# EAGLE board CT_schematic (EAGLE 7.6.0)

Size 100 x 80 mm. Coordinates in mm from the lower left corner, seen from the top.
Outline: 0,0 100,0 100,80 0,80 0,0
Copper layers (1*16): Top 0.035mm / dielectric 1.5mm / Bottom 0.035mm
Design rules "default": minimum track width 10mil, minimum drill 24mil, track to track 8mil, track to pad 8mil, pad to pad 8mil, via to via 8mil, smd to smd 8mil, copper to edge 40mil, drill to drill 8mil, minimum pad ring 10mil, minimum via ring 8mil, stop-mask expansion 4mil, vias tented up to drill 0mil, thermal gap 10mil

## Footprints (pad centres in the part's own frame; a part is rotated, then mirrored left to right if it is on the bottom)
C0603 = smd 0.8 x 0.8: 1 -0.762,0; 2 0.762,0
C0402 = smd 0.5 x 0.5: 1 -0.508,0; 2 0.508,0
C0805 = smd 1.2 x 1.3: 1 -1.016,0; 2 1.016,0
C1206 = smd 1.3 x 1.6: 1 -1.524,0; 2 1.524,0
C1210 = smd 1.2 x 2.5: 1 -1.524,0; 2 1.524,0
EXV-9H = smd 3.505 x 1.676: 1 -2.857,0; 2 2.857,0
L0603 = smd 0.8 x 0.8: 1 -0.762,0; 2 0.762,0
PJ-037B_PACKAGE = drill 3.7 square: 1 12,0 | drill 3.2 square: 2 6,0
R0603 = smd 0.8 x 0.8: 1 -0.762,0; 2 0.762,0
UFBGA144 = smd 0.32 x 0.32: A1 -2.75,2.75; A2 -2.25,2.75; A3 -1.75,2.75; A4 -1.25,2.75; A5 -0.75,2.75; A6 -0.25,2.75; A7 0.25,2.75; A8 0.75,2.75; A9 1.25,2.75; A10 1.75,2.75; A11 2.25,2.75; A12 2.75,2.75; B1 -2.75,2.25; B2 -2.25,2.25; B3 -1.75,2.25; B4 -1.25,2.25; B5 -0.75,2.25; B6 -0.25,2.25; B7 0.25,2.25; B8 0.75,2.25; B9 1.25,2.25; B10 1.75,2.25; B11 2.25,2.25; B12 2.75,2.25; C1 -2.75,1.75; C2 -2.25,1.75; C3 -1.75,1.75; C4 -1.25,1.75; C5 -0.75,1.75; C6 -0.25,1.75; C7 0.25,1.75; C8 0.75,1.75; C9 1.25,1.75; C10 1.75,1.75; C11 2.25,1.75; C12 2.75,1.75; D1 -2.75,1.25; D2 -2.25,1.25; D3 -1.75,1.25; D4 -1.25,1.25; D5 -0.75,1.25; D6 -0.25,1.25; D7 0.25,1.25; D8 0.75,1.25; D9 1.25,1.25; D10 1.75,1.25; D11 2.25,1.25; D12 2.75,1.25; E1 -2.75,0.75; E2 -2.25,0.75; E3 -1.75,0.75; E4 -1.25,0.75; E5 -0.75,0.75; E6 -0.25,0.75; E7 0.25,0.75; E8 0.75,0.75; E9 1.25,0.75; E10 1.75,0.75; E11 2.25,0.75; E12 2.75,0.75; F1 -2.75,0.25; F2 -2.25,0.25; F3 -1.75,0.25; F4 -1.25,0.25; F5 -0.75,0.25; F6 -0.25,0.25; F7 0.25,0.25; F8 0.75,0.25; F9 1.25,0.25; F10 1.75,0.25; F11 2.25,0.25; F12 2.75,0.25; G1 -2.75,-0.25; G2 -2.25,-0.25; G3 -1.75,-0.25; G4 -1.25,-0.25; G5 -0.75,-0.25; G6 -0.25,-0.25; G7 0.25,-0.25; G8 0.75,-0.25; G9 1.25,-0.25; G10 1.75,-0.25; G11 2.25,-0.25; G12 2.75,-0.25; H1 -2.75,-0.75; H2 -2.25,-0.75; H3 -1.75,-0.75; H4 -1.25,-0.75; H5 -0.75,-0.75; H6 -0.25,-0.75; H7 0.25,-0.75; H8 0.75,-0.75; H9 1.25,-0.75; H10 1.75,-0.75; H11 2.25,-0.75; H12 2.75,-0.75; J1 -2.75,-1.25; J2 -2.25,-1.25; J3 -1.75,-1.25; J4 -1.25,-1.25; J5 -0.75,-1.25; J6 -0.25,-1.25; J7 0.25,-1.25; J8 0.75,-1.25; J9 1.25,-1.25; J10 1.75,-1.25; J11 2.25,-1.25; J12 2.75,-1.25; K1 -2.75,-1.75; K2 -2.25,-1.75; K3 -1.75,-1.75; K4 -1.25,-1.75; K5 -0.75,-1.75; K6 -0.25,-1.75; K7 0.25,-1.75; K8 0.75,-1.75; K9 1.25,-1.75; K10 1.75,-1.75; K11 2.25,-1.75; K12 2.75,-1.75; L1 -2.75,-2.25; L2 -2.25,-2.25; L3 -1.75,-2.25; L4 -1.25,-2.25; L5 -0.75,-2.25; L6 -0.25,-2.25; L7 0.25,-2.25; L8 0.75,-2.25; L9 1.25,-2.25; L10 1.75,-2.25; L11 2.25,-2.25; L12 2.75,-2.25; M1 -2.75,-2.75; M2 -2.25,-2.75; M3 -1.75,-2.75; M4 -1.25,-2.75; M5 -0.75,-2.75; M6 -0.25,-2.75; M7 0.25,-2.75; M8 0.75,-2.75; M9 1.25,-2.75; M10 1.75,-2.75; M11 2.25,-2.75; M12 2.75,-2.75
SSOP-28 = smd 1.5 x 0.4: 1 -3.625,4.225; 2 -3.625,3.575; 3 -3.625,2.925; 4 -3.625,2.275; 5 -3.625,1.625; 6 -3.625,0.975; 7 -3.625,0.325; 8 -3.625,-0.325; 9 -3.625,-0.975; 10 -3.625,-1.625; 11 -3.625,-2.275; 12 -3.625,-2.925; 13 -3.625,-3.575; 14 -3.625,-4.225; 15 3.625,-4.225; 16 3.625,-3.575; 17 3.625,-2.925; 18 3.625,-2.275; 19 3.625,-1.625; 20 3.625,-0.975; 21 3.625,-0.325; 22 3.625,0.325; 23 3.625,0.975; 24 3.625,1.625; 25 3.625,2.275; 26 3.625,2.925; 27 3.625,3.575; 28 3.625,4.225
FCI_10118193-0001LF = smd 0.4 x 1.35: 1 -1.3,2.675; 2 -0.65,2.675; 3 0,2.675; 4 0.65,2.675; 5 1.3,2.675 | smd 1.6 x 1.4: 6 -3.2,2.45; 7 3.2,2.45 | smd 1.9 x 1.9: 8 -1.2,0; 9 1.2,0 | hole 0.5: -3.3,0; 3.3,0
MOLEX_47219-2001 = smd 0.8 x 1.5: 1 3.2,-2.1; 2 2.1,-2.1; 3 1,-2.1; 4 -0.1,-2.1; 5 -1.2,-2.1; 6 -2.3,-2.1; 7 -3.4,-2.1; 8 -4.5,-2.1 | smd 1.5 x 2.05: G1 6.875,-4.7; G2 6.875,3.6; G3 -6.875,3.6; G4 -6.875,-4.7
USON-8 = smd 0.3 x 0.4: 1 0,0; 2 0.5,0; 3 1,0; 4 1.5,0; 5 1.5,2.4; 6 1,2.4; 7 0.5,2.4; 8 0,2.4 | smd 1.65 x 0.25: 9 0.75,1.2
SOT143B = smd 1 x 0.7: 1 -0.75,-1 | smd 0.6 x 0.7: 2 0.95,-1; 3 0.95,1; 4 -0.95,1
ABLS-12.000MHZ-B4-T = smd 5.6 x 2.8: 1 0,0; 2 9.5,0
ASEK = smd 1.4 x 1: 1 -1.1,-0.8; 2 1.1,-0.8; 3 1.1,0.8; 4 -1.1,0.8
ASFL1 = smd 1.7 x 1.5: 1 -1.27,-1.1; 2 1.27,-1.1; 3 1.27,1.1; 4 -1.27,1.1
WSON-8 = smd 0.3 x 0.6: 1 -0.75,0; 2 0.05,0; 3 0.85,0; 4 1.65,0; 5 1.65,3.8; 6 0.85,3.8; 7 0.05,3.8; 8 -0.75,3.8 | smd 3 x 2.6: PAD 0.45,1.9
SON-6 = smd 0.55 x 0.3: 1 -0.355,0.5 | smd 0.52 x 0.3: 2 -0.37,0; 3 -0.37,-0.5; 4 0.37,-0.5; 5 0.37,0; 6 0.37,0.5
SW_4-1437565-2 = smd 1.4 x 2.1: 1 -2.23,4.55; 2 -2.23,-4.55; 3 2.23,4.55; 4 2.23,-4.55
LGM67K-G1J2-24-Z = smd 0.8 x 1.4: A -2,0; C 0,0
NC7SZ125M5X = smd 1.3 x 0.7: 1 -1.3,0.95; 2 -1.3,0; 3 -1.3,-0.95; 4 1.3,-0.95; 5 1.3,0.95

## Placement (x,y rotation side)
C1  1e-06  [C0603]  -60.96,60.96 0 top  (outside the outline)
C2  1e-07  [C0603]  -64.77,60.96 0 top  (outside the outline)
C3  1e-07  [C0603]  -68.58,60.96 0 top  (outside the outline)
C4  1e-07  [C0603]  -72.39,60.96 0 top  (outside the outline)
C5  1e-07  [C0603]  -15.24,66.04 0 top  (outside the outline)
C6  1e-07  [C0603]  -19.05,66.04 0 top  (outside the outline)
C7  1e-07  [C0603]  -22.86,66.04 0 top  (outside the outline)
C8  1e-07  [C0603]  -26.67,66.04 0 top  (outside the outline)
C9  1e-07  [C0603]  -30.48,66.04 0 top  (outside the outline)
C10  1e-07  [C0603]  -34.29,66.04 0 top  (outside the outline)
C11  1e-07  [C0603]  -38.1,66.04 0 top  (outside the outline)
C12  1e-07  [C0603]  -41.91,66.04 0 top  (outside the outline)
C13  1e-07  [C0603]  -45.72,66.04 0 top  (outside the outline)
C14  4.7e-06  [C0603]  -49.53,60.96 0 top  (outside the outline)
C15  1e-08  [C0603]  -49.53,66.04 0 top  (outside the outline)
C16  1e-06  [C0603]  -53.34,66.04 0 top  (outside the outline)
C17  1e-07  [C0603]  -57.15,66.04 0 top  (outside the outline)
C18  2.2e-06  [C0603]  -53.34,60.96 0 top  (outside the outline)
C19  2.2e-06  [C0603]  -57.15,60.96 0 top  (outside the outline)
C20  1e-06  [C0603]  -60.96,66.04 0 top  (outside the outline)
C21  1e-07  [C0402]  -34.29,71.12 0 top  (outside the outline)
C22  4.7e-06  [C0805]  -53.34,48.26 0 top  (outside the outline)
C23  1e-07  [C0402]  -38.1,71.12 0 top  (outside the outline)
C24  1e-07  [C0402]  -41.91,71.12 0 top  (outside the outline)
C25  1e-07  [C0402]  -45.72,71.12 0 top  (outside the outline)
C26  1e-05  [C0805]  -58.42,48.26 0 top  (outside the outline)
C27  1e-07  [C0402]  -49.53,71.12 0 top  (outside the outline)
C28  1e-08  [C0402]  -53.34,71.12 0 top  (outside the outline)
C29  1e-08  [C0402]  -57.15,71.12 0 top  (outside the outline)
C30  1e-08  [C0402]  -60.96,71.12 0 top  (outside the outline)
C31  1e-05  [C1206]  -35.56,48.26 0 top  (outside the outline)
C32  1e-05  [C0805]  -63.5,48.26 0 top  (outside the outline)
C33  1e-08  [C0402]  -64.77,71.12 0 top  (outside the outline)
C34  1e-05  [C1206]  -41.91,48.26 0 top  (outside the outline)
C35  1e-05  [C1210]  -29.21,49.53 0 top  (outside the outline)
C36  1e-07  [C0402]  -68.58,71.12 0 top  (outside the outline)
C37  0.0001  [EXV-9H]  -38.1,41.91 0 top  (outside the outline)
C38  0.0001  [EXV-9H]  -49.53,41.91 0 top  (outside the outline)
C39  1e-08  [C0402]  -72.39,71.12 0 top  (outside the outline)
F1  240.0  [L0603]  -64.77,66.04 0 top  (outside the outline)
J1  PJ-037B  [PJ-037B_PACKAGE]  -60.96,7.62 0 top  (outside the outline)
R2  1000.0  [R0603]  -68.58,66.04 0 top  (outside the outline)
R7  4700.0  [R0603]  -72.39,66.04 0 top  (outside the outline)
R8  10000.0  [R0603]  -71.12,55.88 0 top  (outside the outline)
R9  10000.0  [R0603]  -15.24,60.96 0 top  (outside the outline)
R10  10000.0  [R0603]  -20.32,60.96 0 top  (outside the outline)
R11  4700.0  [R0603]  -15.24,71.12 0 top  (outside the outline)
R12  10000.0  [R0603]  -25.4,60.96 0 top  (outside the outline)
R13  10000.0  [R0603]  -30.48,60.96 0 top  (outside the outline)
R14  100000.0  [R0603]  -68.58,48.26 0 top  (outside the outline)
R15  100000.0  [R0603]  -73.66,48.26 0 top  (outside the outline)
R16  100000.0  [R0603]  -15.24,55.88 0 top  (outside the outline)
R17  100000.0  [R0603]  -20.32,55.88 0 top  (outside the outline)
R18  100000.0  [R0603]  -25.4,55.88 0 top  (outside the outline)
R19  100000.0  [R0603]  -30.48,55.88 0 top  (outside the outline)
R20  100000.0  [R0603]  -35.56,55.88 0 top  (outside the outline)
R21  100000.0  [R0603]  -40.64,55.88 0 top  (outside the outline)
R22  100000.0  [R0603]  -45.72,55.88 0 top  (outside the outline)
R23  100000.0  [R0603]  -50.8,55.88 0 top  (outside the outline)
R24  806.0  [R0603]  -19.05,71.12 0 top  (outside the outline)
R25  1000.0  [R0603]  -22.86,71.12 0 top  (outside the outline)
R26  100000.0  [R0603]  -55.88,55.88 0 top  (outside the outline)
R27  2231.0  [R0603]  -26.67,71.12 0 top  (outside the outline)
R28  1000.0  [R0603]  -30.48,71.12 0 top  (outside the outline)
R29  10000.0  [R0603]  -35.56,60.96 0 top  (outside the outline)
R30  10000.0  [R0603]  -40.64,60.96 0 top  (outside the outline)
R31  82000.0  [R0603]  -45.72,60.96 0 top  (outside the outline)
R32  300000.0  [R0603]  -60.96,55.88 0 top  (outside the outline)
R33  120000.0  [R0603]  -66.04,55.88 0 top  (outside the outline)
U1  STM32F446ZEJ7  [UFBGA144]  -43.18,22.86 0 top  (outside the outline)
U2  FT232RL-REEL  [SSOP-28]  -40.64,7.62 0 top  (outside the outline)
U3  10118193-0001LF  [FCI_10118193-0001LF]  -55.88,33.02 0 top  (outside the outline)
U4  0472192001  [MOLEX_47219-2001]  -22.86,8.89 0 top  (outside the outline)
U5  SST26WF040BT-104I/NP  [USON-8]  -15.24,74.93 0 top  (outside the outline)
U6  10118193-0001LF  [FCI_10118193-0001LF]  -66.04,33.02 0 top  (outside the outline)
U7  prtr5v0u2ax  [SOT143B]  -27.94,76.2 0 top  (outside the outline)
U8  ABLS-12.000MHZ-B4-T  [ABLS-12.000MHZ-B4-T]  -71.12,41.91 0 top  (outside the outline)
U9  ASEK-32.768KHz-ECST  [ASEK]  -29.21,41.91 0 top  (outside the outline)
U10  ASFL1-25MHZ-NCS  [ASFL1]  -46.99,33.02 0 top  (outside the outline)
U11  LP3878SDX-ADJ/NOPB  [WSON-8]  -64.77,20.32 0 top  (outside the outline)
U12  LP3878SDX-ADJ/NOPB  [WSON-8]  -30.48,31.75 0 top  (outside the outline)
U13  TPS3895ADRYR  [SON-6]  -31.75,74.93 0 top  (outside the outline)
U14  4-1437565-2  [SW_4-1437565-2]  -27.94,22.86 0 top  (outside the outline)
U15  Q65110A2395  [LGM67K-G1J2-24-Z]  -17.78,49.53 0 top  (outside the outline)
U16  nc7sz125m5x  [NC7SZ125M5X]  -46.99,48.26 0 top  (outside the outline)

## Library data of the parts
C1-C39 F1 J1 R2 R7-R33 U1-U16 = circuit_tree

## Nets
CLK_CRYSTAL_U2_27: U2.27 U8.1
CLK_CRYSTAL_U2_28: U2.28 U8.2
CLK_U1_B1: U1.B1 U9.3
CLK_U1_D1: U1.D1 U10.3
GND: C1.2 C2.2 C3.2 C4.2 C5.2 C6.2 C7.2 C8.2 C9.2 C10.2 C11.2 C12.2 C13.2 C14.2 C15.2 C16.2 C17.2 C18.2 C19.2 C20.2 C21.2 C22.2 C23.2 C24.2 C25.2 C26.2 C27.2 C28.2 C29.2 C30.2 C31.2 C32.2 C33.2 C34.2 C35.2 C36.2 C37.2 C38.2 C39.2 J1.2 R2.2 R8.2 R10.2 R13.2 R25.2 R28.2 R31.2 R33.2 U1.C12 U1.D2 U1.E6 U1.E7 U1.G4 U1.G8 U1.G10 U1.H6 U1.J1 U1.K1 U2.7 U2.18 U2.21 U2.25 U2.26 U3.5 U3.6 U3.7 U3.8 U3.9 U4.6 U4.G1 U4.G2 U4.G3 U4.G4 U5.4 U5.9 U6.5 U6.6 U6.7 U6.8 U6.9 U7.1 U9.2 U10.2 U11.3 U11.PAD U12.3 U12.PAD U13.2 U15.C U16.1 U16.3
NET_U1_D5: R8.1 U1.D5
NET_U1_E5: R9.1 U1.E5
NET_U1_F1: R7.1 U1.F1 U16.4
NET_U1_G9: C19.1 U1.G9
NET_U1_H5: R10.1 U1.H5
NET_U1_H7: C18.1 U1.H7
NET_U1_M1: C15.1 C16.1 F1.1 U1.L1 U1.M1
NET_U1_M11: U15.A
NET_U1_M12: U14.3 U14.4
NET_U2_14: R12.1 U2.14
NET_U2_17: C23.1 U2.17
NET_U2_19: R13.1 U2.19
NET_U3_1: R11.1 U3.1
NET_U3_2: U2.16 U3.2
NET_U3_3: U2.15 U3.3
NET_U3_19: R11.2
NET_U11_1: C30.1 U11.1
NET_U11_6: R24.2 R25.1 U11.6
NET_U11_8: R23.1 U11.8
NET_U12_1: C33.1 U12.1
NET_U12_6: R27.2 R28.1 U12.6
NET_U12_8: R26.1 U12.8
NET_U13_1: R30.1 R31.1 U13.1
NET_U13_3: R32.2 R33.1 U13.3
NET_U13_4: R29.1 U13.4 U16.2
NET_U14_1: R2.1 U14.1 U14.2
PROC_QUADSPI_BK1_IO0: U1.G3 U5.5
PROC_QUADSPI_BK1_IO1: U1.G2 U5.2
PROC_QUADSPI_BK1_IO2: R21.1 U1.A3 U5.3
PROC_QUADSPI_BK1_IO3: R22.1 U1.F3 U5.7
PROC_QUADSPI_BK1_NCS: R20.1 U1.C6 U5.1
PROC_QUADSPI_CLK: U1.D9 U5.6
PROC_SDIO_CK: R15.1 U1.C10 U4.5
PROC_SDIO_CMD: R14.1 U1.E9 U4.3
PROC_SDIO_D0: R16.1 U1.F11 U4.7
PROC_SDIO_D1: R17.1 U1.E11 U4.8
PROC_SDIO_D2: R18.1 U1.B11 U4.1
PROC_SDIO_D3: R19.1 U1.B10 U4.2
PROC_UART4_CTS: U1.L4 U2.3
PROC_UART4_RTS: U1.A10 U2.11
PROC_UART4_RX: U1.K2 U2.1
PROC_UART4_TX: U1.J2 U2.5
PROC_USB_OTG_FS_DM: U1.C12 U6.2 U7.3
PROC_USB_OTG_FS_DP: U1.B12 U6.3 U7.2
PROC_USB_OTG_FS_VBUS: C20.1 U1.D12 U6.1 U7.4
VCC_S1_9V4: C31.1 C34.1 C37.1 C38.1 J1.1 R23.2 R26.2 U11.4 U12.4
VCC_TIER1_1V8: C1.1 C2.1 C3.1 C4.1 C5.1 C6.1 C7.1 C8.1 C9.1 C10.1 C11.1 C12.1 C13.1 C14.1 C17.1 C24.1 C25.1 C26.1 C27.1 C32.1 C36.1 C39.1 F1.2 R7.2 R9.2 R14.2 R15.2 R16.2 R17.2 R18.2 R19.2 R20.2 R21.2 R22.2 R24.1 R29.2 R30.2 R32.1 U1.C2 U1.C11 U1.D3 U1.F4 U1.F5 U1.F6 U1.F7 U1.F8 U1.F9 U1.F10 U1.G5 U1.G6 U1.G7 U2.4 U4.4 U5.8 U11.5 U13.6 U16.5
VCC_TIER1_3V3: C21.1 C22.1 C28.1 C29.1 C35.1 R12.2 R27.1 U2.20 U9.4 U10.4 U12.5

## Tracks (layer width: path | path; a pad name or v marks a point on that pad's centre or on a via)
CLK_CRYSTAL_U2_27  (1 unrouted)
CLK_CRYSTAL_U2_28  (1 unrouted)
CLK_U1_B1  (1 unrouted)
CLK_U1_D1  (1 unrouted)
GND  (90 unrouted)
NET_U1_D5  (1 unrouted)
NET_U1_E5  (1 unrouted)
NET_U1_F1  (2 unrouted)
NET_U1_G9  (1 unrouted)
NET_U1_H5  (1 unrouted)
NET_U1_H7  (1 unrouted)
NET_U1_M1  (4 unrouted)
NET_U1_M12  (1 unrouted)
NET_U2_14  (1 unrouted)
NET_U2_17  (1 unrouted)
NET_U2_19  (1 unrouted)
NET_U3_1  (1 unrouted)
NET_U3_2  (1 unrouted)
NET_U3_3  (1 unrouted)
NET_U11_1  (1 unrouted)
NET_U11_6  (2 unrouted)
NET_U11_8  (1 unrouted)
NET_U12_1  (1 unrouted)
NET_U12_6  (2 unrouted)
NET_U12_8  (1 unrouted)
NET_U13_1  (2 unrouted)
NET_U13_3  (2 unrouted)
NET_U13_4  (2 unrouted)
NET_U14_1  (2 unrouted)
PROC_QUADSPI_BK1_IO0  (1 unrouted)
PROC_QUADSPI_BK1_IO1  (1 unrouted)
PROC_QUADSPI_BK1_IO2  (2 unrouted)
PROC_QUADSPI_BK1_IO3  (2 unrouted)
PROC_QUADSPI_BK1_NCS  (2 unrouted)
PROC_QUADSPI_CLK  (1 unrouted)
PROC_SDIO_CK  (2 unrouted)
PROC_SDIO_CMD  (2 unrouted)
PROC_SDIO_D0  (2 unrouted)
PROC_SDIO_D1  (2 unrouted)
PROC_SDIO_D2  (2 unrouted)
PROC_SDIO_D3  (2 unrouted)
PROC_UART4_CTS  (1 unrouted)
PROC_UART4_RTS  (1 unrouted)
PROC_UART4_RX  (1 unrouted)
PROC_UART4_TX  (1 unrouted)
PROC_USB_OTG_FS_DM  (2 unrouted)
PROC_USB_OTG_FS_DP  (2 unrouted)
PROC_USB_OTG_FS_VBUS  (3 unrouted)
VCC_S1_9V4  (8 unrouted)
VCC_TIER1_1V8  (56 unrouted)
VCC_TIER1_3V3  (10 unrouted)